# Altium PCB MatrixLED_v2_PCB.PcbDoc
Units mm, origin at the board's own origin, x right, y up, seen from the top; angles counter-clockwise.
Board outline 22.5 x 38.5 mm, 2 copper layers (Top Layer, Bottom Layer), stack 1.571 mm thick; 8 components, 22 nets, 58 pads, 12 vias.
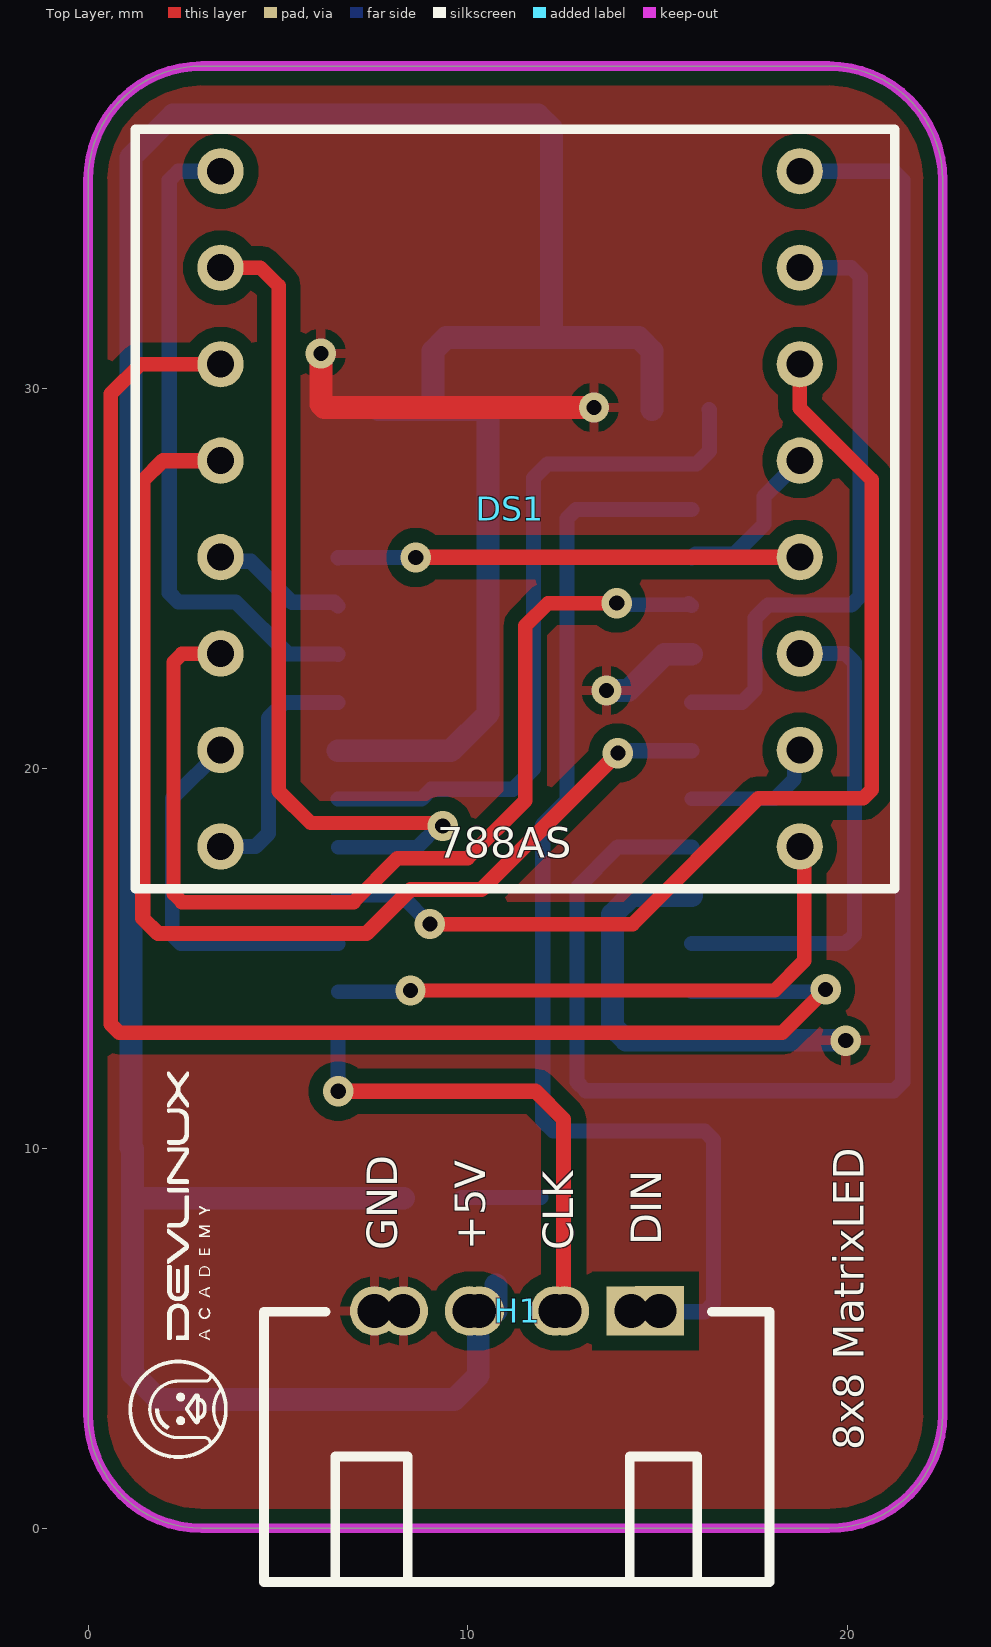
[diagram p0: Top Layer view]
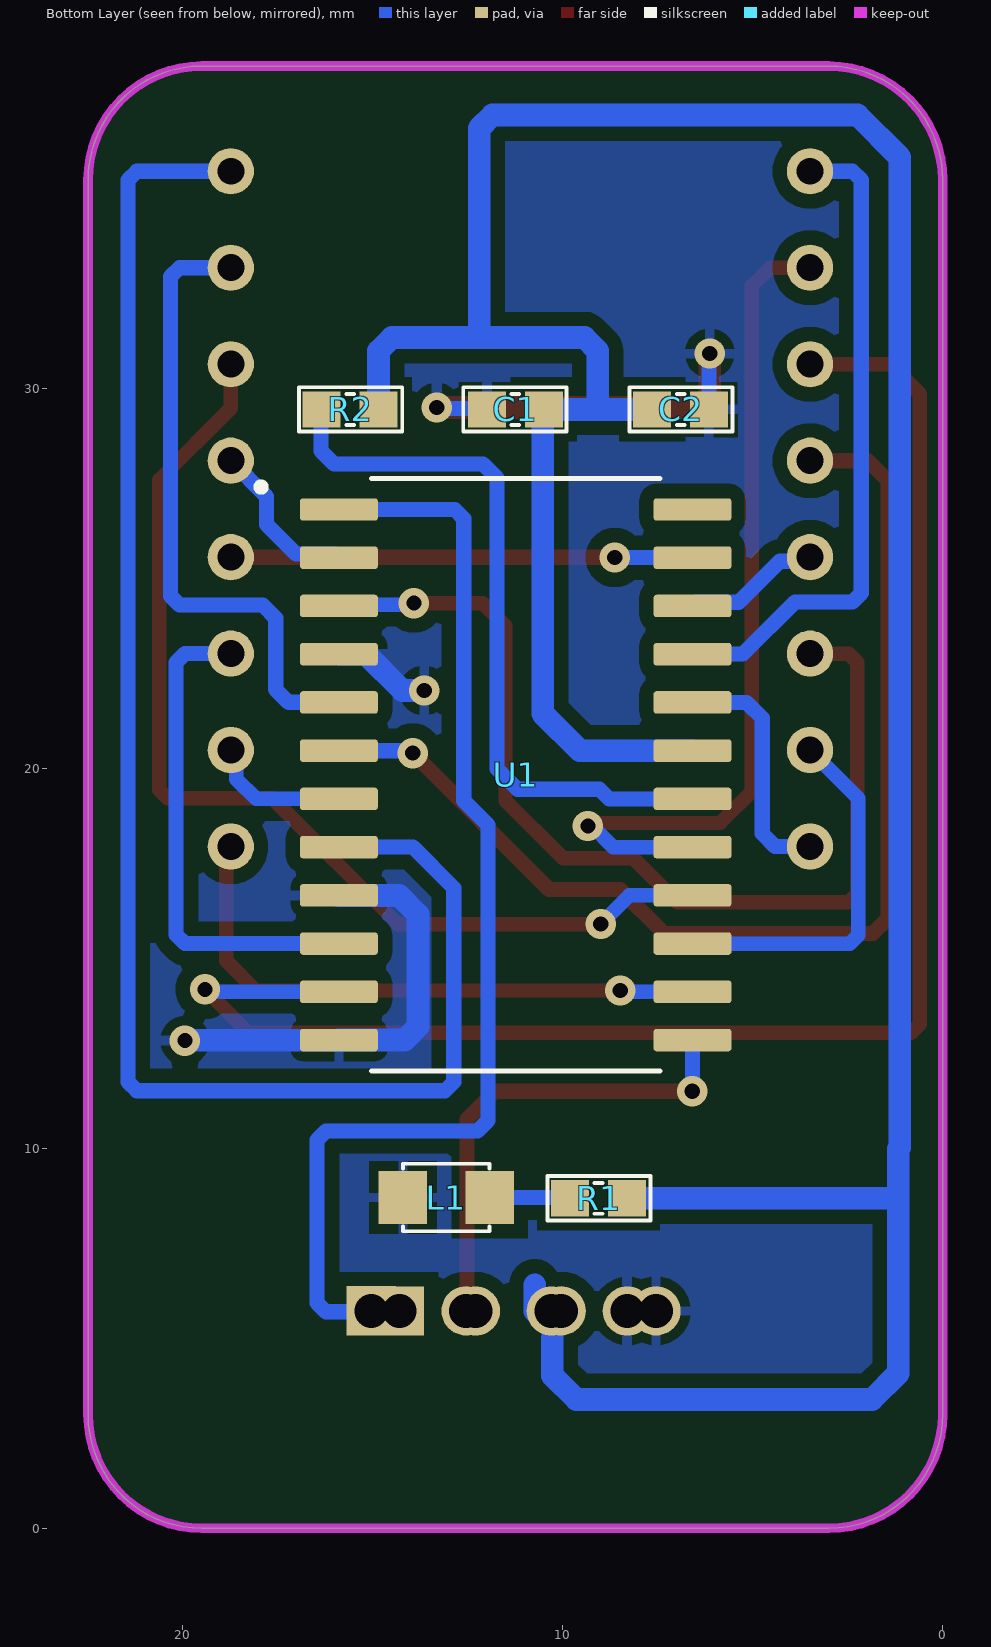
[diagram p1: Bottom Layer view, seen from below]
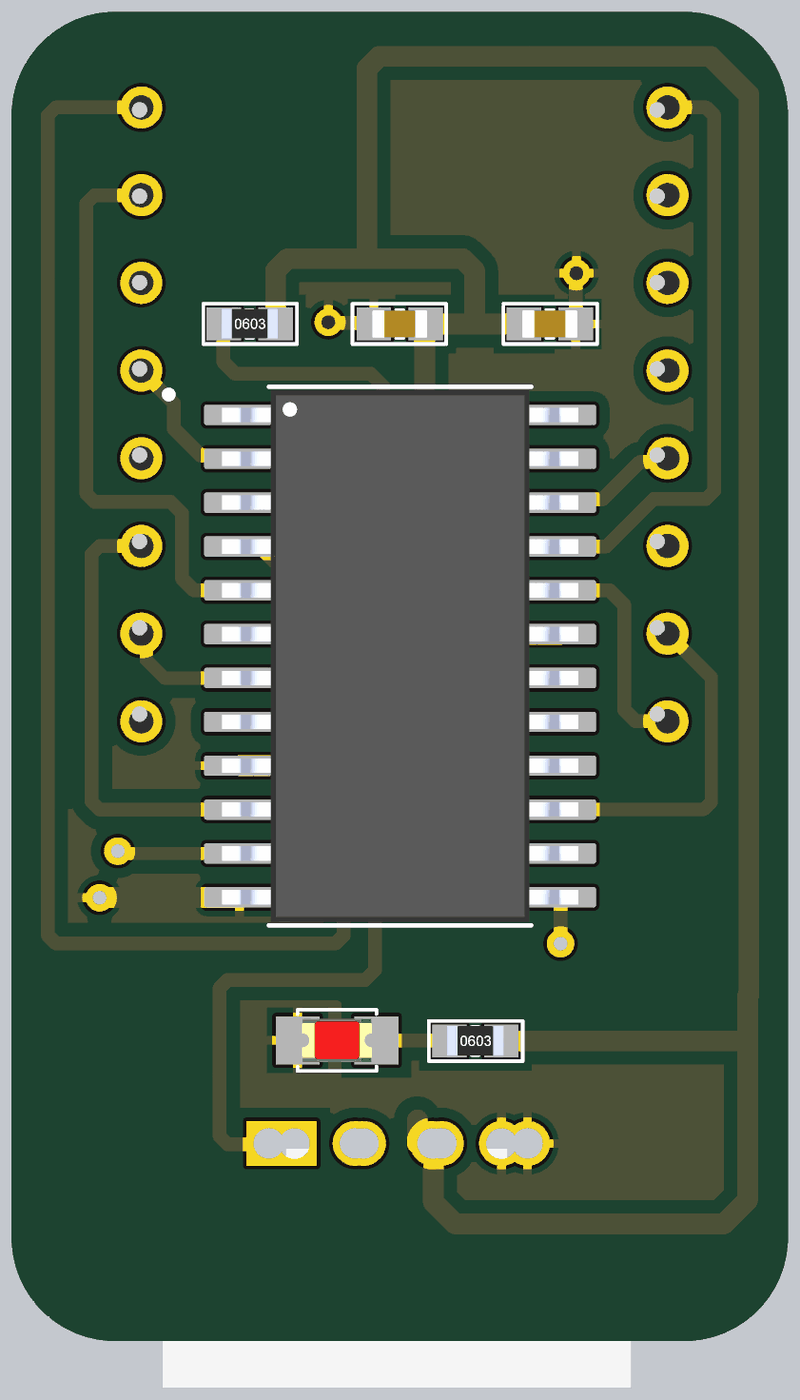
[diagram p2: 3D render of the assembled board from below, using the file's embedded part models]

## Layer stack, top to bottom
Top Solder: solder mask 0.0102, Solder Resist, Dk 3.5
Top Layer: signal copper 0.0356
Dielectric 1: dielectric 1.5, FR-4, Dk 4.8
Bottom Layer: signal copper 0.0356
Bottom Solder: solder mask 0.0102, Solder Resist, Dk 3.5

## Board outline
0,3 0,35.5 cw(c3,35.5) 3,38.5 19.5,38.5 cw(c19.5,35.5) 22.5,35.5 22.5,3 cw(c19.5,3) 19.5,0 3,0 cw(c3,3)

## Design rules (kind name [scope] priority, off if disabled: settings)
Clearance [All] p1: gap=0.178 ignorepadtopadclearanceinfootprint=FALSE except(0: Arc-Hole Track-Hole SMDPad-Hole THPad-Hole Via-Hole Fill-Hole Poly-Hole Region-Hole Text-Hole; 0.381: Arc-Arc Arc-Track Arc-Fill Arc-Poly Arc-Region Track-Track Track-Fill Track-Poly Track-Region SMDPad-Fill SMDPad-Poly SMDPad-Region THPad-Fill THPad-Poly THPad-Region Via-Fill Via-Poly Via-Region)
PolygonConnect [All] p1: connectstyle=Relief reliefconductorwidth=0.254 reliefentries=4 polygonreliefangle="90 Angle" airgapwidth=0.254
RoomDefinition MatrixLED_v2_SCH [InComponentClass('MatrixLED_v2_SCH')] p1: confinementstyle=ConfineIn formatcopy=TRUE lockcomponents=FALSE outline 167.593,19.651 260.303,19.651 260.303,54.703 167.593,54.703
RoutingVias [All] p1: holewidth=0.4 width=0.8 viastyle="Through Hole" minholewidth=0.3 minwidth=0.6 maxholewidth=0.5 maxwidth=1
SolderMaskExpansion [All] p1: expansion=0.102 istentingtop=FALSE
Width Net [All] p1: maxlimit=0.6 minlimit=0.254 preferedwidth=0.4
30 further rules are at their usual default settings.

## Components (designator, comment, footprint, x,y, rotation, side; value= is the part's Value field where it differs from the comment)
C1 "1uF" "tu 0603" 11.25,29.46 r0 bottom
C2 "100nF" "tu 0603" 6.9,29.46 r180 bottom
DS1 "788AS" 788AS 11.24,26.84 r0 top
H1 "Header 4P 2.54 + 2.0 Duc Cong" "Header 4P DC 2.54 + 2.0" 15.02,5.7 r270 top
L1 "LED RED" LED-0805-Red 11.925,8.709 r0 bottom
R1 "1K" "tro smd 0603" 9.06,8.69 r180 bottom
R2 "10K" "tro smd 0603" 15.6,29.46 r180 bottom
U1 "MAX7219EWG" SOIC127P1032X265-24N 11.24,19.84 r180 bottom

## Footprints (in the part's own frame and the unit in brackets; to place one, negate y for a bottom-side part, rotate by r counter-clockwise, add the part's x,y. Pads: shape width x height; smd on the part's side, far side on the other; paste and mask are expansions set on the pad)
788AS [mm]
  round 1.218 hole 0.71: 1(-7.75,8.89) 2(-7.75,6.35) 3(-7.75,3.81) 4(-7.75,1.27) 5(-7.75,-1.27) 6(-7.75,-3.81) 7(-7.75,-6.35) 8(-7.75,-8.89) 9(7.5,-8.89) 10(7.5,-6.35) 11(7.5,-3.81) 12(7.5,-1.27) 13(7.5,1.27) 14(7.5,3.81) 15(7.5,6.35) 16(7.5,8.89)
  silkscreen extent -10,-10 10,10, body extent -9.95,-9.93 10.08,10.07, height 6
"Header 4P DC 2.54 + 2.0" [mm]
  rect 1.3x1.3 hole 0.889: 1(-0.025,0.025) 1(-0.022,-0.719)
  round 1.3 hole 0.889: 2(-0.025,-2.475) 2(-0.022,-2.719) 3(-0.025,-4.975) 3(-0.022,-4.719) 4(-0.025,-7.475) 4(-0.022,-6.718)
  silkscreen extent 0,-10.39 7.11,2.92, body extent 0.13,-10.48 7.06,3.11, height 7.38
LED-0805-Red [mil]
  rect 50x55 smd: 1(0,0) 2(90,0)
  silkscreen extent 0,-35 90,35, body extent 5,-25 85,25, height 43
SOIC127P1032X265-24N [mm]
  rrect25% 2.05x0.59 smd: 1(-4.655,6.985) 2(-4.655,5.715) 3(-4.655,4.445) 4(-4.655,3.175) 5(-4.655,1.905) 6(-4.655,0.635) 7(-4.655,-0.635) 8(-4.655,-1.905) 9(-4.655,-3.175) 10(-4.655,-4.445) 11(-4.655,-5.715) 12(-4.655,-6.985) 13(4.655,-6.985) 14(4.655,-5.715) 15(4.655,-4.445) 16(4.655,-3.175) 17(4.655,-1.905) 18(4.655,-0.635) 19(4.655,0.635) 20(4.655,1.905) 21(4.655,3.175) 22(4.655,4.445) 23(4.655,5.715) 24(4.655,6.985)
  silkscreen extent -6.81,-7.8 3.8,7.8, body extent -5.16,-7.7 5.16,7.7, height 2.65
"tro smd 0603" [mm] "Chip Capacitor, 2-Leads, Body 1,60x0,80mm, IPC Medium Density"
  rect 1x0.95 smd mask+0.076: 1(-0.75,0) 2(0.75,0)
  silkscreen extent -1.35,-0.58 1.37,0.58, body extent -0.82,-0.42 0.82,0.43, height 0.44
"tu 0603" [mm] "Chip Capacitor, 2-Leads, Body 1,60x0,80mm, IPC Medium Density"
  rect 1x0.95 smd mask+0.076: 1(-0.75,0) 2(0.75,0)
  silkscreen extent -1.35,-0.58 1.37,0.58, body extent -0.8,-0.4 0.8,0.4, height 0.9

## Part data
C1 C2: library part "Tu 0603 104 50V 10%", "Dán", Chung_Loai=Dán, Don_Vi=Con, Ma_Hang=MH004568, So_Chan=2, Ten_Linh_Kien="Tụ 0603 104-100nF 10% 50V"
DS1: "31.70mm (1.2â€) 3.0x3.0 SQUARE dot matrix LED display.BI-COLOR", Package=None, Check_prices=https://www.snapeda.com/parts/BL-M12A883-DUG/Betlux/view-part/?ref=eda, MF=Betlux, MP=BL-M12A883-DUG, SnapEDA_Link=https://www.snapeda.com/parts/BL-M12A883-DUG/Betlux/view-part/?ref=snap
H1: "Cắm", Chung_Loai=Cắm, Don_Vi=Con, Ma_Hang=MH001310, Ten_Linh_Kien="Header 4P XH2.54-4P Đực Cong"
L1: library part "LED 0805 Do", "Dán", Chung_Loai=Dán, Don_Vi=Con, Ma_Hang=MH000897, Ten_Linh_Kien="LED 0805 Màu Đỏ (Red)"
R1: library part "Tro 0603 1% 1k", "Dán", Chung_Loai=Dán, Don_Vi=Con, Ma_Hang=MH006334, So_Chan=2, Ten_Linh_Kien="Trở 0603 1% 1k"
R2: library part "Tro 0603 1% 10k", "Dán", Chung_Loai=Dán, Don_Vi=Con, Ma_Hang=MH006333, So_Chan=2, Ten_Linh_Kien="Trở 0603 1% 10k"
U1: "LED Driver 64 Segment 330000uA Supply Current 24-Pin SOIC W Tube", Package="SOIC-24 Maxim", Check_prices=https://www.snapeda.com/parts/MAX7219EWG+/Analog+Devices/view-part/?ref=eda, MF="Analog Devices", MP=MAX7219EWG+, SnapEDA_Link=https://www.snapeda.com/parts/MAX7219EWG+/Analog+Devices/view-part/?ref=snap

## Via types
v1: diameter 0.8, hole 0.4, Top Layer to Bottom Layer, 12 vias

## Nets (pads, with @x,y where several pads share a name; then routed paths per layer and width w, separated by ;. In a path a pad name is that pad's centre, name@x,y a point inside that pad or via, vN(x,y) a via of type N, cw(c..) or ccw(c..) an arc to the next point about the centre after c; other vN are vias at no path point)
+5: C1.1 C2.1 H1.3 R1.2 R2.2 U1.19 | length 92
  Bottom Layer w0.6: U1.19 6.59,20.47 9.55,20.47 10.53,21.45 10.53,29.43 C1.1 9.08,29.46 ; C2.1 9.08,29.46 ; R1.2 1.17,8.69 ; 10.276,5.012 10.276,4.026 9.64,3.39 1.86,3.39 1.17,4.08 1.17,8.69 ; H1.3@10.738,5.722 10.738,6.406 ; R2.2 14.85,30.999 14.499,31.35 12.2,31.35 ; 1.17,8.69 1.17,9.99 1.13,10.03 1.13,36.1 2.24,37.21 11.849,37.21 12.2,36.859 12.2,31.35 ; 9.08,29.46 9.08,30.999 9.431,31.35 12.2,31.35
CLK: H1.2 U1.13 | length 12.8
  Top Layer w0.4: v1(6.59,11.51) 11.78,11.51 12.52,10.77 H1.2@12.52,5.547
  Bottom Layer w0.4: U1.13 6.585,11.515 v1(6.59,11.51)
DIG_0: DS1.13 U1.2 | length 4.3
  Bottom Layer w0.4: U1.2 15.99,25.65 17.02,25.65 17.8,26.43 17.8,27.17 DS1.13
DIG_1: DS1.3 U1.11 | length 42.7
  Top Layer w0.381: DS1.3 1.38,30.65 0.6,29.87 0.6,13.273 0.823,13.05 18.28,13.05 v1(19.42,14.19)
  Bottom Layer w0.381: U1.11 19.355,14.125 v1(19.42,14.19)
DIG_2: DS1.4 U1.6 | length 30.4
  Top Layer w0.4: DS1.4 1.97,28.11 1.44,27.58 1.44,16.06 1.84,15.66 7.33,15.66 8.49,16.82 10.36,16.82 v1(13.95,20.41)
  Bottom Layer w0.4: v1(13.95,20.41) 14.015,20.475 U1.6
DIG_3: DS1.10 U1.7 | length 3.7
  Bottom Layer w0.381: U1.7 18.075,19.205 18.596,19.726 18.596,20.346 DS1.10
DIG_4: DS1.6 U1.3 | length 27.2
  Top Layer w0.381: DS1.6 2.473,23.03 2.25,22.807 2.25,16.713 2.473,16.49 6.99,16.49 8.141,17.641 9.991,17.641 11.509,19.159 11.509,23.759 12.11,24.36 v1(13.92,24.36)
  Bottom Layer w0.381: v1(13.92,24.36) 13.958,24.322 15.782,24.322 15.82,24.36 U1.3
DIG_5: DS1.11 U1.10 | length 13.1
  Bottom Layer w0.4: U1.10 19.946,15.395 20.18,15.629 20.18,22.796 19.946,23.03 DS1.11
DIG_6: DS1.15 U1.5 | length 16.8
  Bottom Layer w0.4: U1.5 15.898,21.748 17.218,21.748 17.56,22.09 17.56,23.97 17.9,24.31 20.096,24.31 20.33,24.544 20.33,32.956 20.096,33.19 DS1.15
DIG_7: DS1.16 U1.8 | length 43.9
  Bottom Layer w0.4: U1.8 13.945,17.935 12.87,16.86 12.87,11.754 13.104,11.52 21.216,11.52 21.45,11.754 21.45,35.496 21.216,35.73 DS1.16
DIN: H1.1 U1.1 | length 30
  Bottom Layer w0.4: H1.1@15.02,5.7 16.236,5.7 16.47,5.934 16.47,10.226 16.236,10.46 12.844,10.46 12.25,10.46 11.97,10.74 11.97,18.52 12.61,19.16 12.61,26.591 12.844,26.825 U1.1
GND: C1.2 C2.2 H1.4 L1.2 U1.4 U1.9 U1.12 | length 25.6
  Top Layer w0.6: v1(6.13,30.93) 6.13,29.6 6.22,29.51 v1(13.32,29.51)
  Bottom Layer w0.4: v1(6.13,30.93) 6.15,30.91 C2.2 ; C1.2 12.025,29.485 13.295,29.485 v1(13.32,29.51)
  Bottom Layer w0.6: v1(13.65,22.06) 14.22,22.06 15.175,23.015 U1.4 ; U1.9 14.315,16.665 13.81,16.16 13.81,13.206 14.161,12.855 U1.12 15.9,12.85 19.94,12.85 v1(19.95,12.84)
ISET: R2.1 U1.18 | length 19.2
  Bottom Layer w0.4: U1.18 8.778,19.205 9.033,19.46 11.19,19.46 11.73,20 11.73,27.65 12.1,28.02 16.02,28.02 16.365,28.365 16.365,29.445 R2.1
NetL1_1: L1.1 R1.1 | length 2.1
  Bottom Layer w0.4: R1.1 9.829,8.709 L1.1
SEG_A: DS1.9 U1.14 | length 15.7
  Top Layer w0.381: v1(8.49,14.16) 18.08,14.16 18.861,14.941 18.861,17.829 DS1.9
  Bottom Layer w0.381: U1.14 8.455,14.125 v1(8.49,14.16)
SEG_B: DS1.14 U1.16 | length 27.8
  Top Layer w0.381: v1(9,15.91) 14.34,15.91 17.65,19.22 20.407,19.22 20.63,19.443 20.63,27.602 18.74,29.492 DS1.14
  Bottom Layer w0.381: U1.16 8.245,16.665 v1(9,15.91)
SEG_C: DS1.8 U1.20 | length 6.4
  Bottom Layer w0.4: DS1.8 4.41,17.95 4.75,18.29 4.75,21.33 5.165,21.745 U1.20
SEG_D: DS1.12 U1.23 | length 12.2
  Top Layer w0.4: v1(8.63,25.56) 8.635,25.565 18.735,25.565 DS1.12
  Bottom Layer w0.4: U1.23 6.588,25.557 8.627,25.557 v1(8.63,25.56)
SEG_DP: DS1.5 U1.22 | length 3.6
  Bottom Layer w0.4: DS1.5 3.6,25.46 4.29,25.46 5.37,24.38 6.49,24.38 U1.22
SEG_E: DS1.1 U1.21 | length 17.4
  Bottom Layer w0.4: DS1.1 2.374,35.73 2.14,35.496 2.14,24.624 2.374,24.39 3.89,24.39 5.262,23.018 6.582,23.018 U1.21
SEG_F: DS1.7 U1.15 | length 9.9
  Bottom Layer w0.381: DS1.7 2.22,19.22 2.22,15.618 2.443,15.395 U1.15
SEG_G: DS1.2 U1.17 | length 22.7
  Top Layer w0.381: DS1.2 4.54,33.19 5.02,32.71 5.02,19.41 5.86,18.57 9.26,18.57 v1(9.34,18.49)
  Bottom Layer w0.381: U1.17 8.672,17.935 9.227,18.49 v1(9.34,18.49)
pads on no net: U1.24

## Polygon pours and split planes (outlines as drawn)
GND on Bottom Layer "NONET_L-01_P-001" (solid, remove dead copper, pour order 1): -2.11,45.37 -2.04,45.44 27.87,45.44 27.87,-1.18 28.01,-1.32 27.67,-1.66 -4,-1.66
GND on Top Layer "NONET_L-01_P-001" (solid, remove dead copper, pour order 0): -2.21,45.46 28.25,45.46 28.43,45.28 28.25,45.1 28.25,-0.97 -1.43,-0.97 -1.89,-1.43

## Keep-outs
Keep-Out Layer:
  the board outline again, w0.254

## Silkscreen, mask and mechanical layers (free items; w line width, h text height)
Top Overlay:
  drawing of 21 lines, arcs and shapes, not listed
  text "788AS" at 9.19,17.66 h0.8
  text "DIN" at 15.09,7.45 h0.8 r90
  text "GND" at 8.14,7.317 h0.8 r90
  text "+5V" at 10.457,7.317 h0.8 r90
  text "CLK" at 12.773,7.317 h0.8 r90
  text "8x8 MatrixLED" at 20.42,2.06 h0.8 r90